# Altium PCB PCB1.PcbDoc
Units mm, origin at the board's own origin, x right, y up, seen from the top; angles counter-clockwise.
Board outline 85.85 x 74.3 mm, 2 copper layers (Top Layer, Bottom Layer); 16 components, 60 nets, 114 pads, 6 vias.
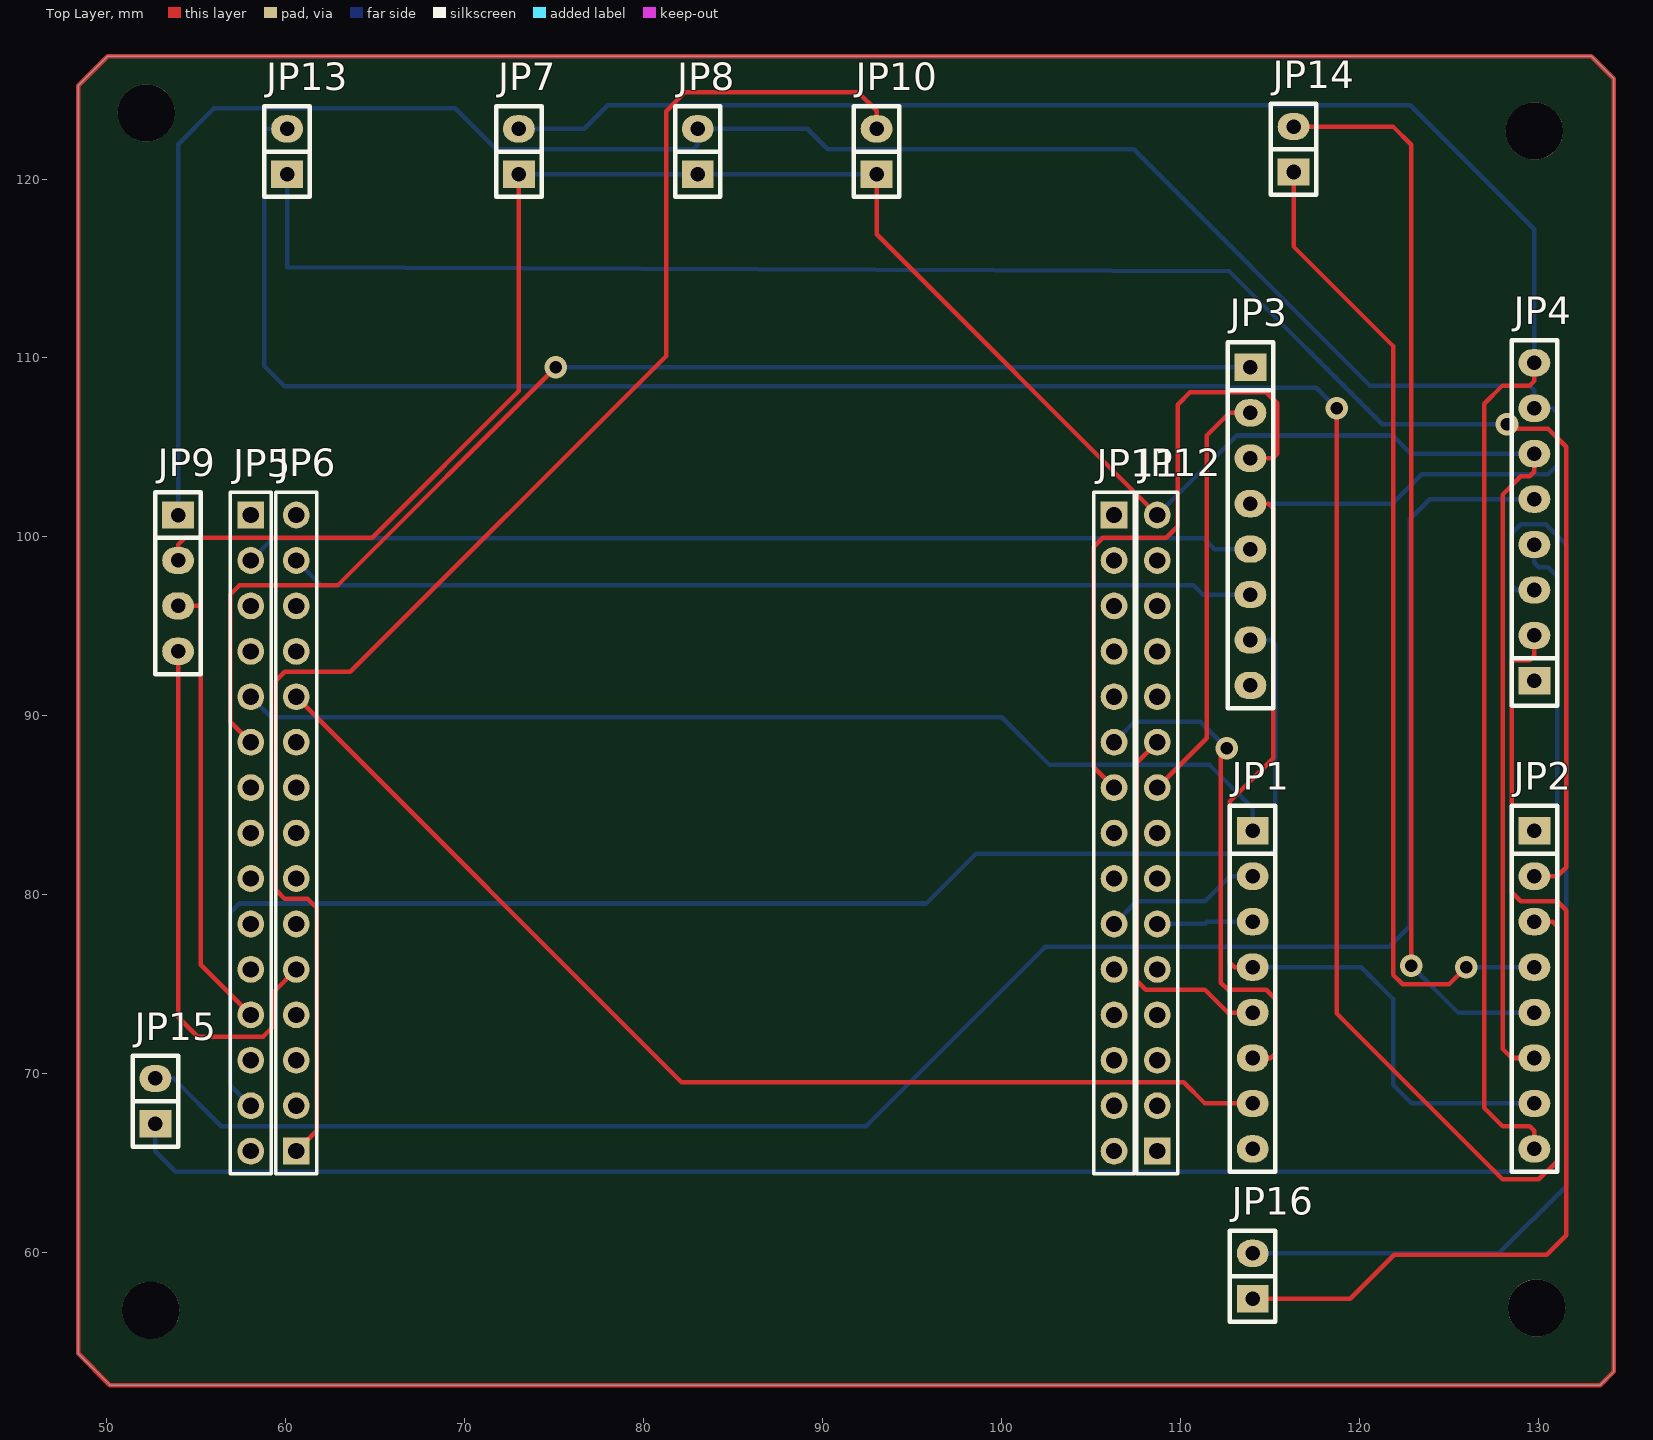
[diagram p0: Top Layer view]
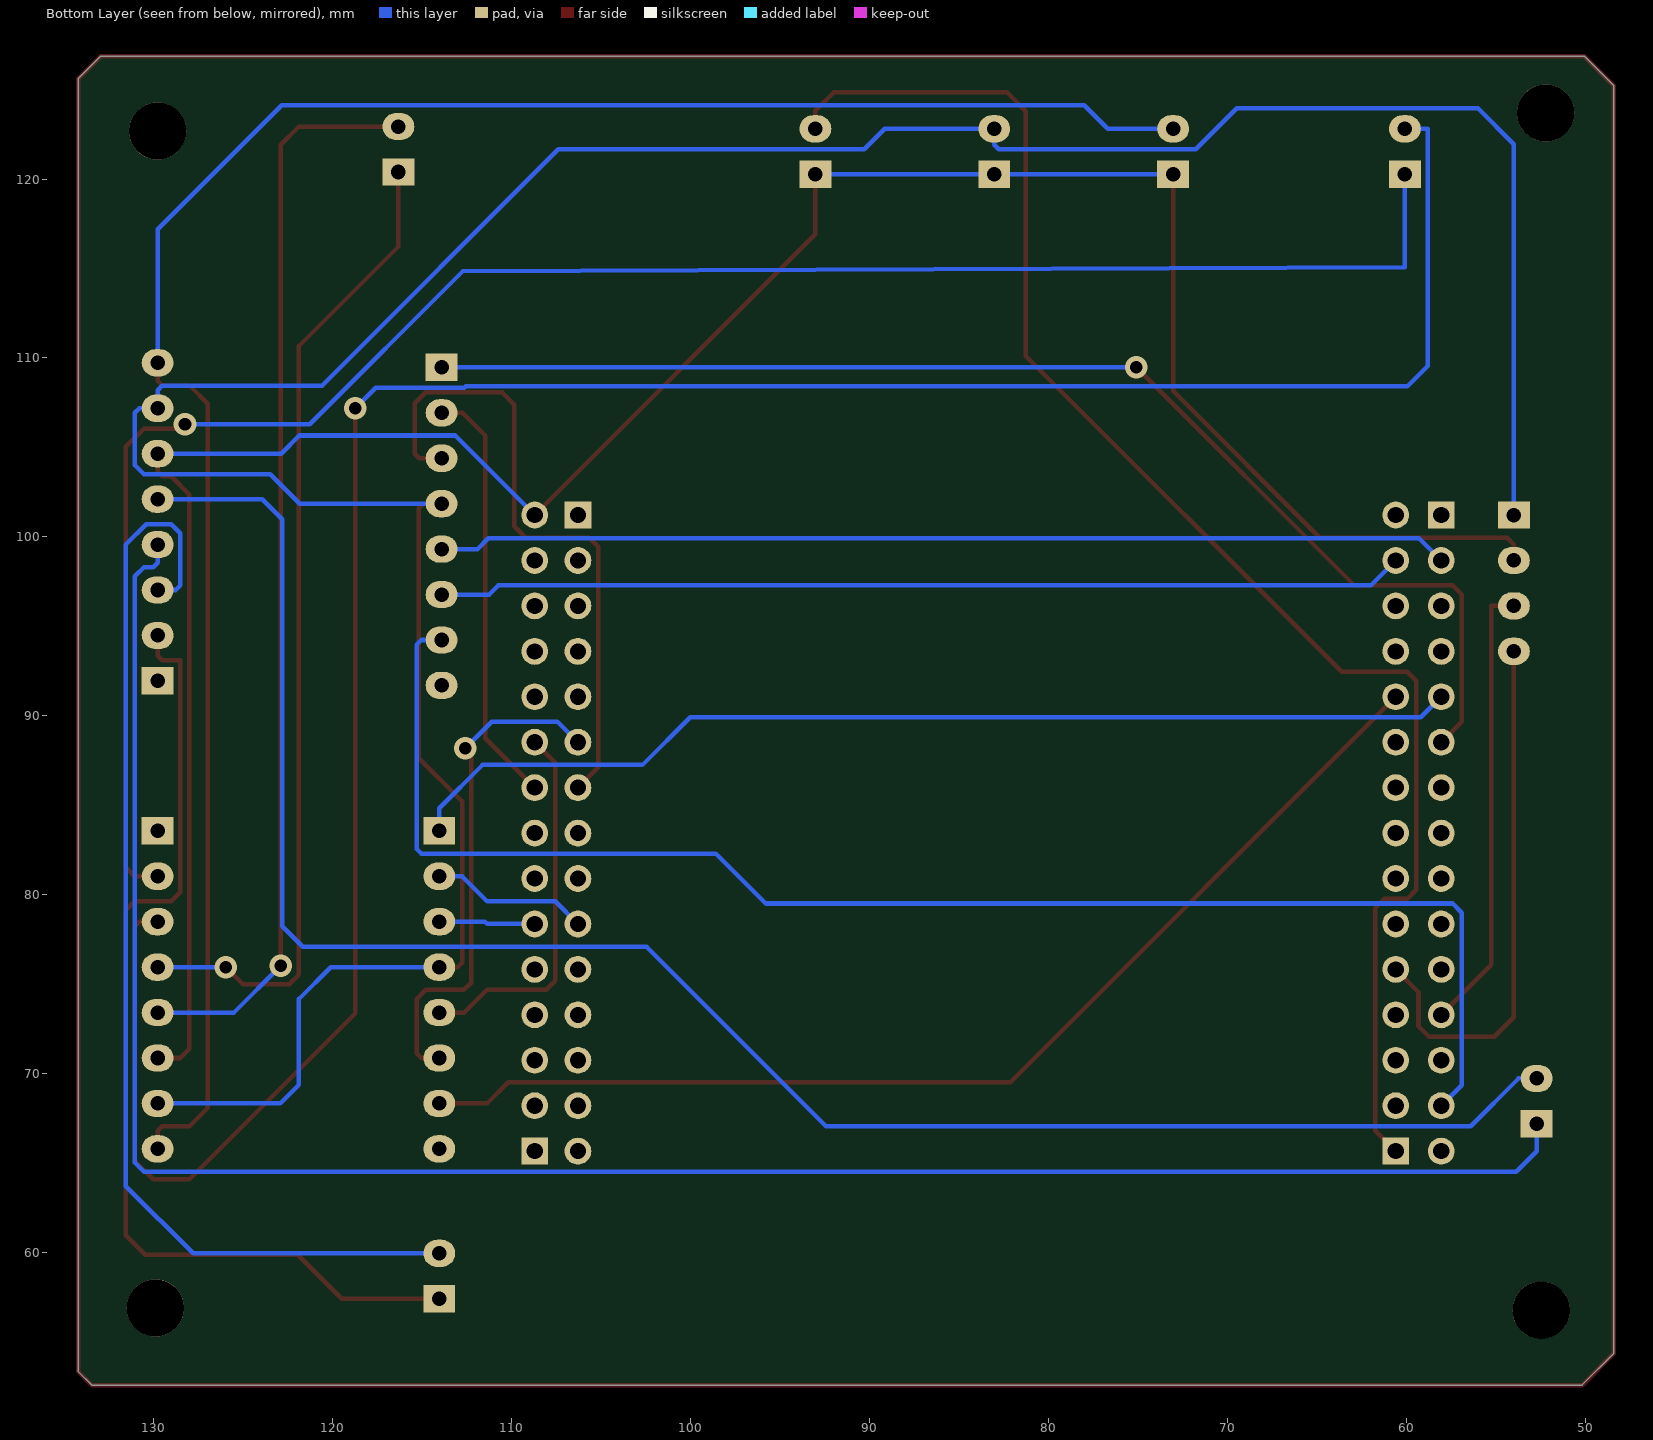
[diagram p1: Bottom Layer view, seen from below]
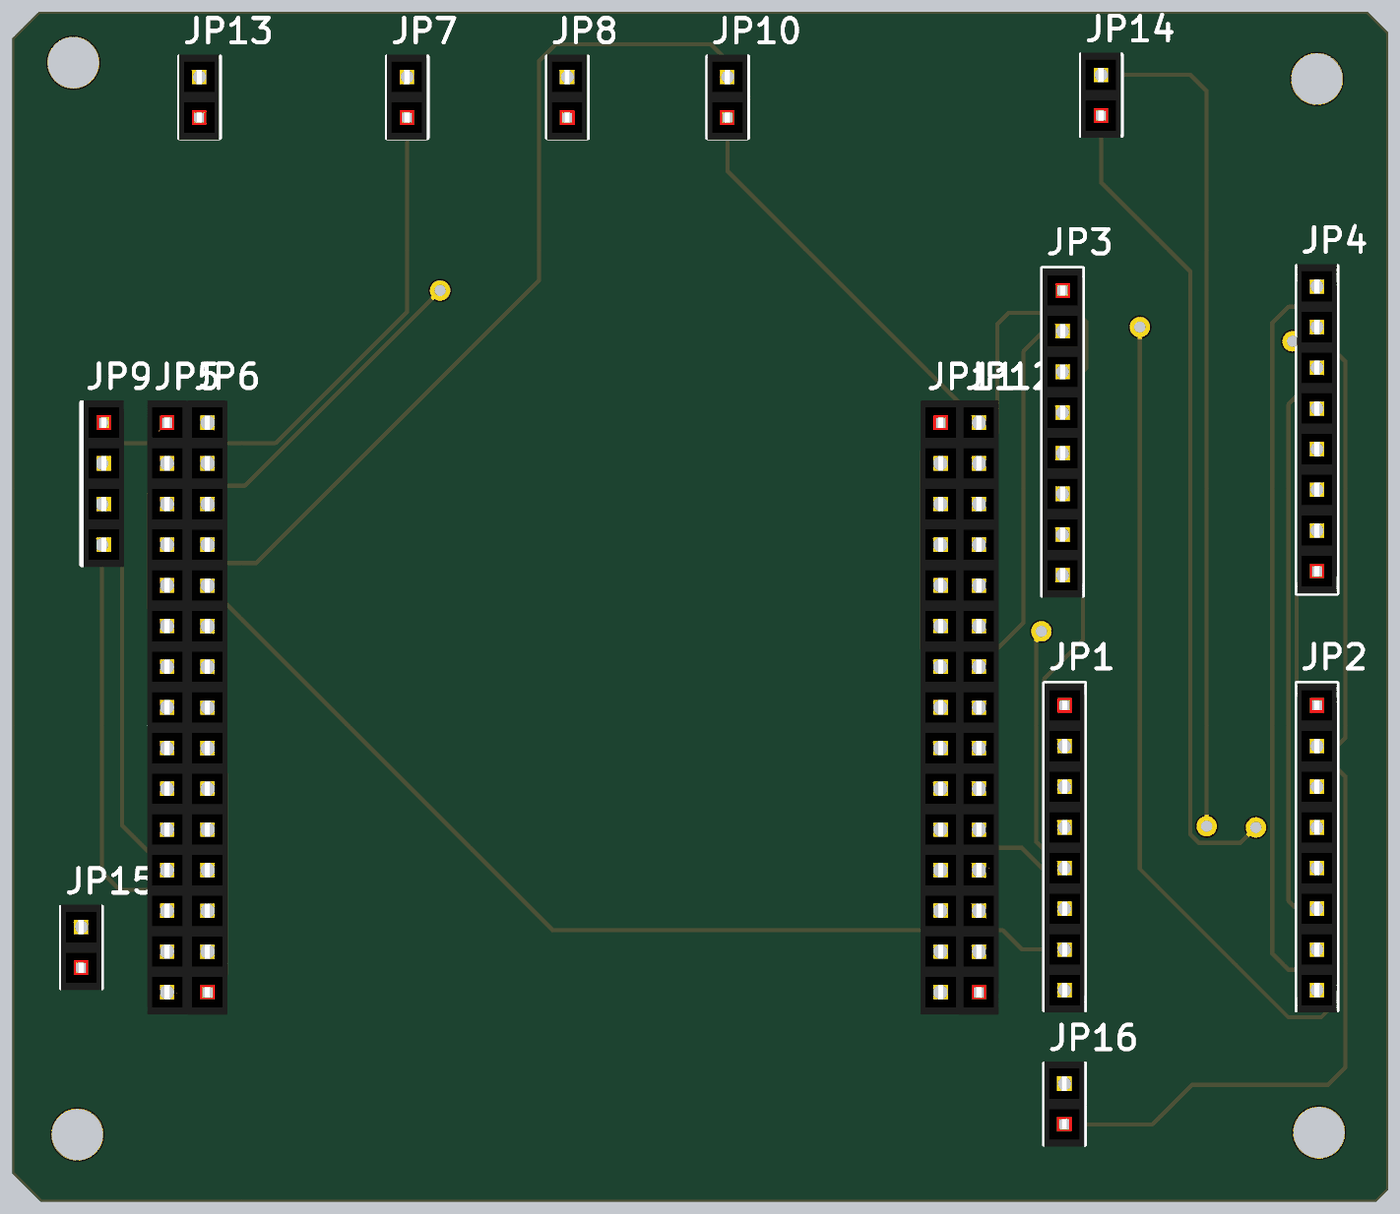
[diagram p2: 3D render of the assembled board from above, using the file's embedded part models]

## Layer stack, top to bottom
Top Solder: solder mask 0.0102, Solder Resist, Dk 3.5
Top Layer: signal copper 0.0356
Dielectric 1: dielectric 0.32, FR-4, Dk 4.8
Bottom Layer: signal copper 0.0356
Bottom Solder: solder mask 0.0102, Solder Resist, Dk 3.5

## Board outline
48.387,54.356 48.387,125.222 50.038,126.873 132.969,126.873 134.239,125.603 134.239,53.34 133.477,52.578 50.165,52.578

## Design rules (kind name [scope] priority, off if disabled: settings)
Clearance [All] p1: gap=0.254 ignorepadtopadclearanceinfootprint=FALSE except(0: Arc-Hole Track-Hole SMDPad-Hole THPad-Hole Via-Hole Fill-Hole Poly-Hole Region-Hole Text-Hole)
PolygonConnect [All] p1: connectstyle=Relief reliefconductorwidth=0.254 reliefentries=4 polygonreliefangle="90 Angle" airgapwidth=0.254
RoomDefinition Sheet1 [InComponentClass('Sheet1')] p1: confinementstyle=ConfineIn formatcopy=TRUE lockcomponents=FALSE outline 199.136,35.941 265.303,35.941 265.303,77.089 199.136,77.089
RoutingVias [All] p1: holewidth=0.711 width=1.27 viastyle="Through Hole" minholewidth=0.711 minwidth=1.27 maxholewidth=0.711 maxwidth=1.27
SolderMaskExpansion [All] p1: expansion=0.102
Width [All] p1: maxlimit=0.254 minlimit=0.254 preferedwidth=0.254
30 further rules are at their usual default settings.

## Components (designator, comment, footprint, x,y, rotation, side; value= is the part's Value field where it differs from the comment)
JP1 "HDR-1X8" Fe-HDR1X8/2.54-S 114.046,83.566 r0 top
JP2 "HDR-1X8" Fe-HDR1X8/2.54-S 129.794,83.566 r0 top
JP3 "HDR-1X8" Fe-HDR1X8/2.54-S 113.919,109.474 r0 top
JP4 "HDR-1X8" Fe-HDR1X8/2.54-S 129.794,91.948 r180 top
JP5 "HDR-1X15" Fe-HDR1X15/2.54-S 58.039,101.219 r0 top
JP6 "HDR-1X15" Fe-HDR1X15/2.54-S 60.579,65.659 r180 top
JP7 "HDR-1X2" Fe-HDR1X2/2.54-S 73.025,120.269 r90 top
JP8 "HDR-1X2" Fe-HDR1X2/2.54-S 83.025,120.269 r90 top
JP9 "HDR-1X4" Fe-HDR1X4/2.54-S 53.975,101.219 r0 top
JP10 "HDR-1X2" Fe-HDR1X2/2.54-S 93.025,120.269 r90 top
JP11 "HDR-1X15" Fe-HDR1X15/2.54-S 106.299,101.219 r0 top
JP12 "HDR-1X15" Fe-HDR1X15/2.54-S 108.712,65.659 r180 top
JP13 "HDR-1X2" Fe-HDR1X2/2.54-S 60.071,120.269 r90 top
JP14 "HDR-1X2" Fe-HDR1X2/2.54-S 116.332,120.396 r90 top
JP15 "HDR-1X2" Fe-HDR1X2/2.54-S 52.705,67.183 r90 top
JP16 "HDR-1X2" Fe-HDR1X2/2.54-S 114.046,57.404 r90 top

## Footprints (in the part's own frame and the unit in brackets; to place one, negate y for a bottom-side part, rotate by r counter-clockwise, add the part's x,y. Pads: shape width x height; smd on the part's side, far side on the other; paste and mask are expansions set on the pad)
Fe-HDR1X2/2.54-S [mil] "Connector; Header; 2x2 Position"
  rect 60x70 hole 32: 1(0,0)
  oval 60x70 hole 32: 2(100,0)
  silkscreen extent -50,-50 150,50, body extent -55,-48 155,50, height 335
Fe-HDR1X4/2.54-S [mil]
  rect 70x60 hole 32: 1(0,0)
  oval 70x60 hole 32: 2(0,-100) 3(0,-200) 4(0,-300)
  silkscreen extent -50,-350 50,50, body extent -44,-355 54,55, height 335
Fe-HDR1X8/2.54-S [mil]
  rect 70x60 hole 32: 1(0,0)
  oval 70x60 hole 32: 2(0,-100) 3(0,-200) 4(0,-300) 5(0,-400) 6(0,-500) 7(0,-600) 8(0,-700)
  silkscreen extent -50,-750 50,55, body extent -49,-755 49,55, height 126
Fe-HDR1X15/2.54-S [mm]
  rect 1.5x1.5 hole 0.9: 1(0,0)
  round 1.5 hole 0.9: 2(0,-2.54) 3(0,-5.08) 4(0,-7.62) 5(0,-10.16) 6(0,-12.7) 7(0,-15.24) 8(0,-17.78) 9(0,-20.32) 10(0,-22.86) 11(0,-25.4) 12(0,-27.94) 13(0,-30.48) 14(0,-33.02) 15(0,-35.56)
  silkscreen extent -1.14,-36.83 1.14,1.27, body extent -1.23,-36.95 1.27,1.4, height 3.2

## Part data
JP1 JP2 JP3 JP4: library part "Header 8", "8P接插件", BOM名称=8P接, 学习资源=www.ooocke.
JP5 JP6 JP11 JP12: library part "Header 15", "15P接插件", BOM名称=15P接, 学习资源=www.ooocke.
JP7 JP8 JP10 JP13 JP14 JP15 JP16: library part "Header 2", "2P接插件", BOM名称=2P接, 学习资源=www.ooocke.
JP9: library part "Header 4", "4P接插件", BOM名称=4P接, 学习资源=www.ooocke.

## Free pads (board coordinates)
  round 3.2 hole 3.2: 10(129.794,122.682) 11(52.197,123.698) 12(52.451,56.769) 13(129.921,56.896)

## Via types
v1: diameter 1.27, hole 0.711, Top Layer to Bottom Layer, 6 vias

## Nets (pads, with @x,y where several pads share a name; then routed paths per layer and width w, separated by ;. In a path a pad name is that pad's centre, name@x,y a point inside that pad or via, vN(x,y) a via of type N, cw(c..) or ccw(c..) an arc to the next point about the centre after c; other vN are vias at no path point)
5V: JP6.1 JP10.2 | length 85.1
  Top Layer w0.254: JP6.1 61.722,66.802 61.722,79.248 61.214,79.756 59.944,79.756 59.436,80.264 59.436,91.948 59.944,92.456 63.602,92.456 81.255,110.109 81.255,123.8 82.296,124.841 91.999,124.841 93.025,123.815 JP10.2
GND: JP2.6 JP4.6 JP7.1 JP8.1 JP9.2 JP10.1 JP12.15 | length 140.8
  Top Layer w0.254: JP9.2 53.975,99.568 54.356,99.949 64.821,99.949 73.025,108.153 JP7.1 ; JP10.1 93.025,116.906 JP12.15 ; JP2.6 128.524,70.866 128.016,71.374 128.016,102.362 129.032,103.378 129.54,103.378 129.794,103.632 JP4.6
  Bottom Layer w0.254: JP7.1 JP8.1 JP10.1 ; JP12.15 113.157,105.664 121.869,105.664 122.885,104.648 JP4.6
LB1: JP4.5 JP15.2 | length 106
  Bottom Layer w0.254: JP15.2 53.721,69.723 56.388,67.056 92.431,67.056 102.464,77.089 121.691,77.089 122.834,78.232 122.834,100.99 123.952,102.108 JP4.5
LB2: JP4.4 JP15.1 | length 115.9
  Bottom Layer w0.254: JP15.1 52.705,65.659 53.848,64.516 130.556,64.516 131.064,65.024 131.064,97.79 130.556,98.298 130.048,98.298 129.794,98.552 JP4.4
LF1: JP2.3 JP13.2 | length 140.4
  Top Layer w0.254: v1(118.745,107.188) 118.745,73.355 128.016,64.084 130.048,64.084 131.064,65.1 131.064,78.232 130.81,78.486 JP2.3
  Bottom Layer w0.254: JP13.2 58.801,122.809 58.801,109.55 59.944,108.407 112.573,108.407 112.649,108.331 117.602,108.331 v1(118.745,107.188)
LF2: JP2.2 JP13.1 | length 106.3
  Top Layer w0.254: v1(128.27,106.299) 128.524,106.045 130.556,106.045 131.572,105.029 131.572,81.534 131.064,81.026 JP2.2
  Bottom Layer w0.254: JP13.1 60.071,115.062 112.725,114.859 121.285,106.299 v1(128.27,106.299)
PA0: JP1.3 JP12.6 | length 5.4
  Bottom Layer w0.254: JP12.6 111.379,78.359 111.506,78.486 JP1.3
PA1: JP1.2 JP11.10 | length 8.9
  Bottom Layer w0.254: JP11.10 107.569,79.629 111.379,79.629 112.776,81.026 JP1.2
PA2: JP12.7
PA3: JP11.9
PA4: JP12.8
PA5: JP11.8
PA6: JP3.2 JP12.9 | length 23.8
  Top Layer w0.254: JP12.9 111.481,88.748 111.481,105.664 112.751,106.934 JP3.2
PA7: JP3.3 JP11.7 | length 36.4
  Top Layer w0.254: JP11.7 105.156,87.122 105.156,99.441 105.664,99.949 109.22,99.949 109.855,100.584 109.855,107.391 110.541,108.077 114.808,108.077 115.418,107.467 115.418,104.648 115.164,104.394 JP3.3
PA8: JP1.1 JP5.5 | length 59.9
  Bottom Layer w0.254: JP5.5 59.182,89.916 100.025,89.916 102.692,87.249 111.633,87.249 114.046,84.836 JP1.1
PA9: JP1.7 JP6.11 | length 62.9
  Top Layer w0.254: JP6.11 82.118,69.52 110.185,69.52 111.379,68.326 JP1.7
PA10: JP3.1 JP5.6 | length 71
  Top Layer w0.254: JP5.6 56.896,89.662 56.896,96.774 57.404,97.282 62.89,97.282 v1(75.082,109.474)
  Bottom Layer w0.254: v1(75.082,109.474) JP3.1
PA11: JP3.7 JP5.14 | length 84.1
  Bottom Layer w0.254: JP5.14 56.896,69.342 56.896,78.994 57.404,79.502 95.809,79.502 98.603,82.296 115.062,82.296 115.316,82.55 115.316,93.98 115.062,94.234 JP3.7
PA12: JP5.15
PA13: JP6.10
PA14: JP5.7
PA15: JP6.9
PB0: JP12.11
PB1: JP11.5
PB3: JP5.10
PB4: JP6.6
PB5: JP5.11
PB6: JP6.5 JP9.4 | length 30.2
  Top Layer w0.254: JP9.4 53.975,73.152 55.067,72.06 58.725,72.06 59.309,72.644 59.309,74.549 JP6.5
PB7: JP5.12 JP9.3 | length 25.3
  Top Layer w0.254: JP9.3 55.245,96.139 55.245,76.073 JP5.12
PB8: JP6.4
PB9: JP5.13
PB10: JP12.12
PB11: JP11.4
PB12: JP5.1
PB13: JP6.15
PB14: JP3.5 JP5.2 | length 56.6
  Bottom Layer w0.254: JP5.2 59.284,99.924 111.303,99.924 111.912,99.314 JP3.5
PB15: JP3.6 JP6.14 | length 54.1
  Bottom Layer w0.254: JP6.14 61.976,97.282 110.744,97.282 111.252,96.774 JP3.6
PC0: JP12.4
PC1: JP11.12
PC2: JP12.5
PC3: JP11.11
PC4: JP1.5 JP12.10 | length 21
  Top Layer w0.254: JP12.10 107.569,87.376 107.569,75.184 108.077,74.676 111.379,74.676 112.649,73.406 JP1.5
PC5: JP1.6 JP11.6 | length 28.5
  Top Layer w0.254: v1(112.598,88.189) 112.268,87.859 112.268,75.082 112.674,74.676 114.808,74.676 115.316,74.168 115.316,71.12 115.062,70.866 JP1.6
  Bottom Layer w0.254: JP11.6 107.442,89.662 111.125,89.662 v1(112.598,88.189)
PC6: JP5.3
PC7: JP6.13
PC8: JP5.4
PC9: JP6.12
PC10: JP5.8
PC11: JP6.8
PC12: JP5.9
PC13: JP11.13
PC14: JP11.14
PC15: JP11.15
PD2: JP6.7
POWER: JP2.8 JP4.8 JP7.2 | length 115.7
  Top Layer w0.254: JP2.8 129.794,66.802 129.54,67.056 128.016,67.056 127,68.072 127,107.442 128.016,108.458 129.54,108.458 129.794,108.712 JP4.8
  Bottom Layer w0.254: JP7.2 76.683,122.809 78.003,124.13 122.86,124.13 129.794,117.196 JP4.8
RB1: JP4.3 JP16.2 | length 63
  Bottom Layer w0.254: JP16.2 127.813,59.944 131.572,63.703 131.572,99.568 130.429,100.711 129.032,100.711 128.524,100.203 128.524,97.282 128.778,97.028 JP4.3
RB2: JP4.2 JP16.1 | length 56.1
  Top Layer w0.254: JP16.1 119.507,57.404 121.971,59.868 130.48,59.868 131.572,60.96 131.572,79.121 131.064,79.629 129.032,79.629 128.524,80.137 128.524,93.091 129.54,93.091 129.794,93.345 JP4.2
RF1: JP2.5 JP14.2 | length 60.9
  Top Layer w0.254: JP14.2 121.895,122.936 122.911,121.92 v1(122.911,76.022)
  Bottom Layer w0.254: v1(122.911,76.022) 125.527,73.406 JP2.5
RF2: JP2.4 JP14.1 | length 55.7
  Top Layer w0.254: JP14.1 116.332,116.23 121.895,110.668 121.895,75.514 122.428,74.981 125.019,74.981 v1(125.984,75.946)
  Bottom Layer w0.254: v1(125.984,75.946) JP2.4
VCC: JP1.4 JP2.7 JP3.4 JP4.7 JP8.2 JP9.1 | length 179.6
  Top Layer w0.254: JP3.4 114.935,101.854 115.189,101.6 115.189,87.63 112.776,85.217 112.776,76.2 113.03,75.946 JP1.4
  Bottom Layer w0.254: JP9.1 53.975,121.945 55.982,123.952 69.469,123.952 71.755,121.666 82.771,121.666 83.025,121.92 JP8.2 89.154,122.809 90.297,121.666 107.391,121.666 120.599,108.458 129.54,108.458 129.794,108.204 JP4.7 130.81,107.188 131.064,106.934 131.064,104.013 130.556,103.505 123.495,103.505 121.844,101.854 JP3.4 ; JP1.4 120.117,75.946 121.895,74.168 121.895,69.367 122.936,68.326 JP2.7
pads on no net: JP1.8 JP2.1 JP3.8 JP4.1 JP6.2 JP6.3 JP11.1 JP11.2 JP11.3 JP12.1 JP12.2 JP12.3 JP12.13 JP12.14
copper on no net: | length 317.1
  Top Layer w0.254: 48.387,54.356 50.165,52.578 133.477,52.578 134.239,53.34 134.239,125.603 132.969,126.873 50.038,126.873 48.387,125.222 48.387,54.356